# Altium PCB PCB1.PcbDoc
Units mil, origin at the board's own origin, x right, y up, seen from the top; angles counter-clockwise.
Board outline 5655 x 1845 mil, 2 copper layers (Top Layer, Bottom Layer); 13 components, 7 nets, 31 pads, 0 vias.
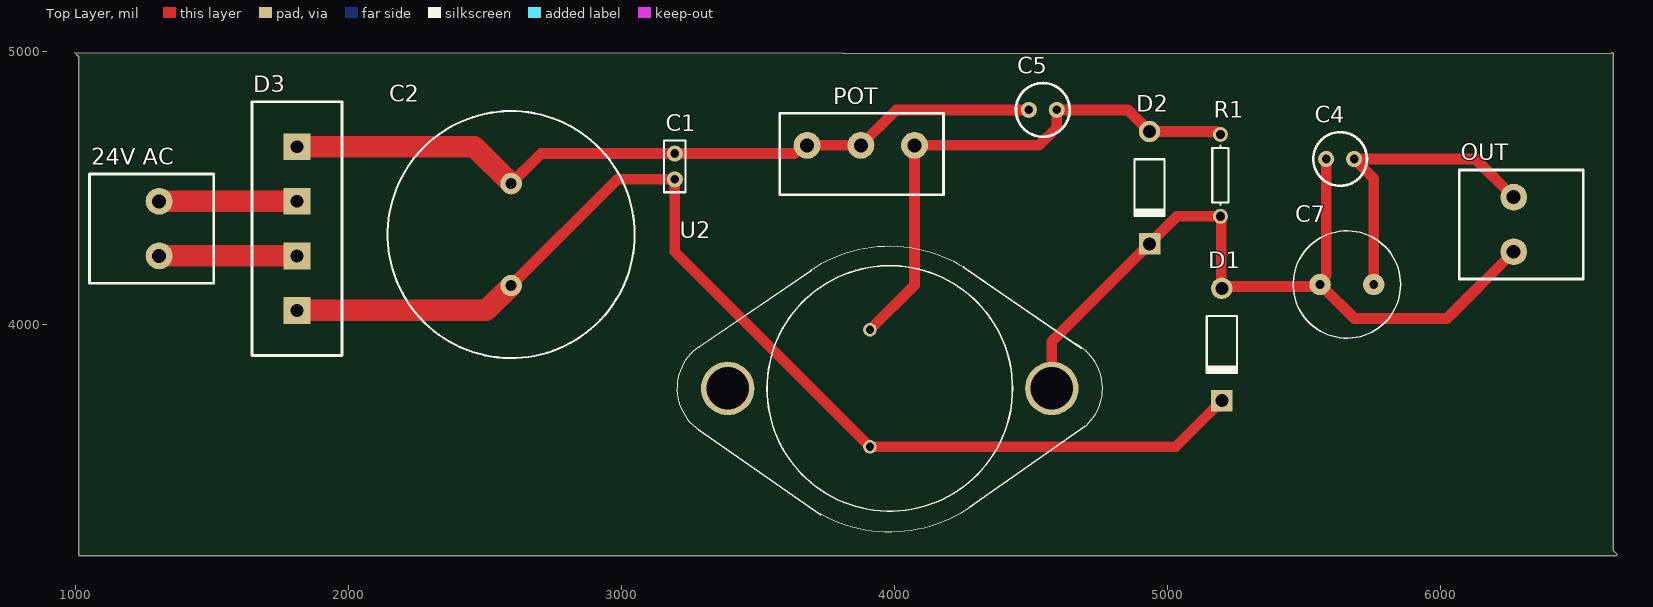
[diagram p0: Top Layer view]
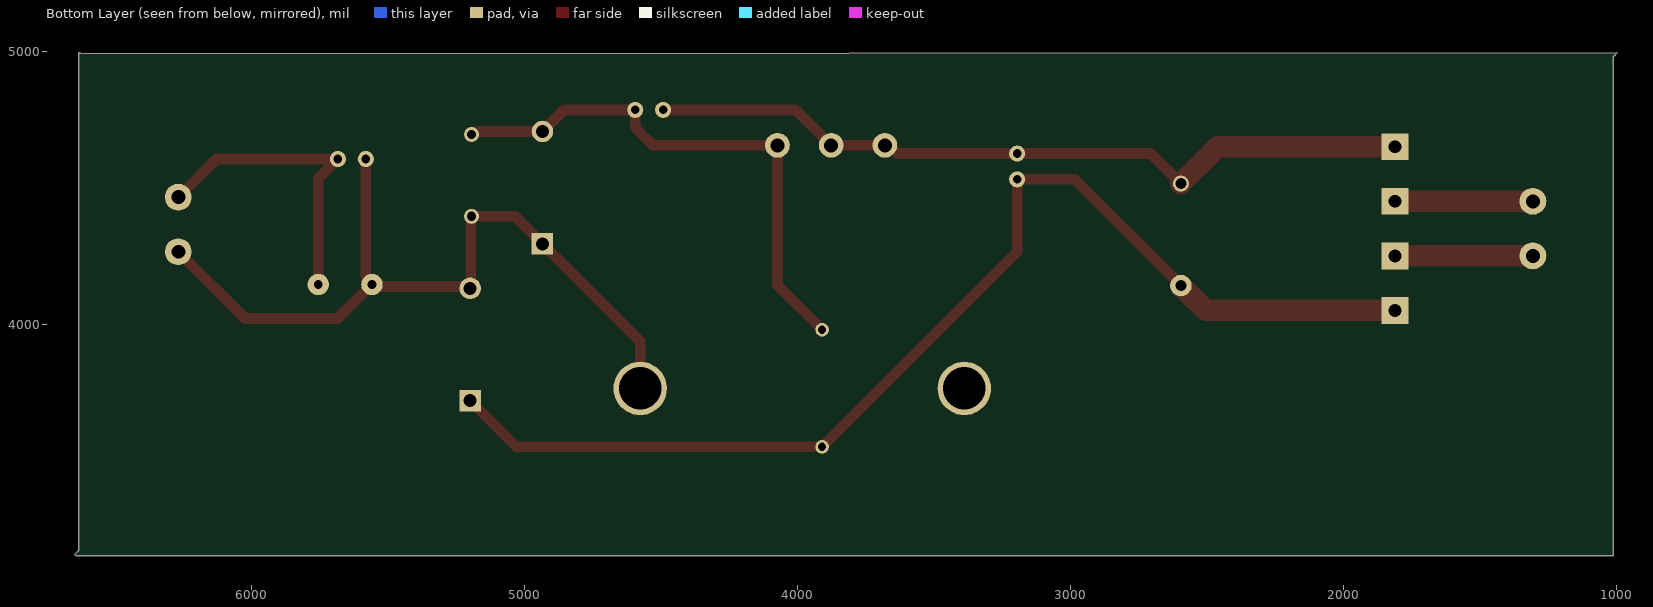
[diagram p1: Bottom Layer view, seen from below]
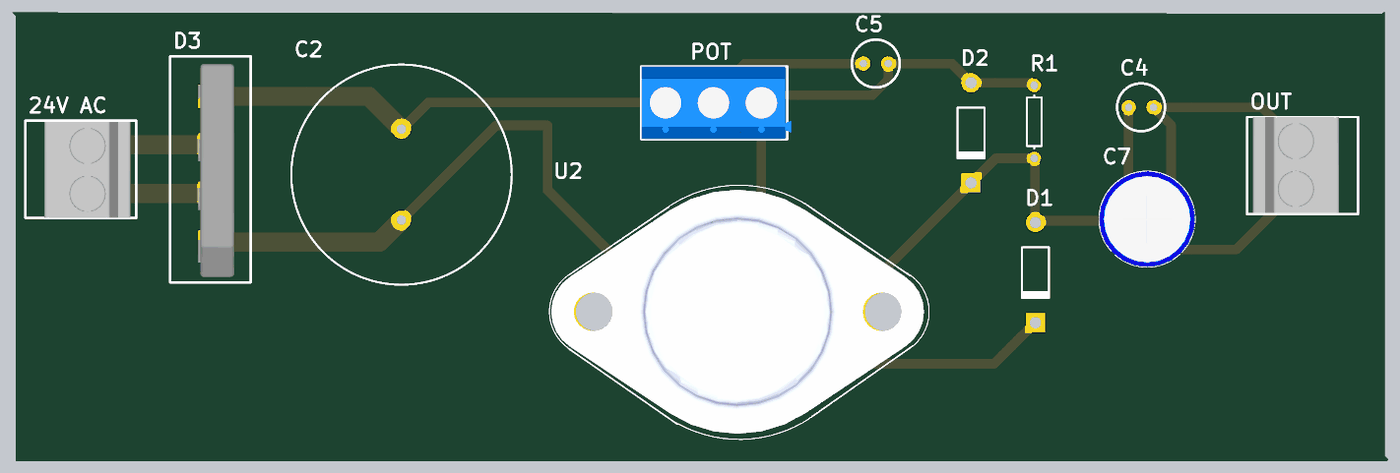
[diagram p2: 3D render of the assembled board from above, using the file's embedded part models]

## Layer stack, top to bottom
Top Solder: solder mask 0.4, Solder Resist, Dk 3.5
Top Layer: signal copper 1.4
Dielectric 1: dielectric 12.6, FR-4, Dk 4.8
Bottom Layer: signal copper 1.4
Bottom Solder: solder mask 0.4, Solder Resist, Dk 3.5

## Board outline
995,4995 1010,4980 1010,3150 6645,3150 6650,3155 6635,3170 6635,4995 6630,4995 6625,4990

## Design rules (kind name [scope] priority, off if disabled: settings)
Clearance [All] p1: gap=10 ignorepadtopadclearanceinfootprint=FALSE except(0: Arc-Hole Track-Hole SMDPad-Hole THPad-Hole Via-Hole Fill-Hole Poly-Hole Region-Hole Text-Hole)
PolygonConnect [All] p1: connectstyle=Relief reliefconductorwidth=10 reliefentries=4 polygonreliefangle="90 Angle" airgapwidth=10
RoutingVias [All] p1: holewidth=28 width=50 viastyle="Through Hole" minholewidth=28 minwidth=50 maxholewidth=28 maxwidth=50
SolderMaskExpansion [All] p1: expansion=4
Width [All] p1: maxlimit=196.85 minlimit=39.37 preferedwidth=78.74
30 further rules are at their usual default settings.

## Components (designator, comment, footprint, x,y, rotation, side; value= is the part's Value field where it differs from the comment)
"24V AC" "2x Terminal" "2x Terminal" 1305,4450 r0 top
C1 "100nF" 100nF 3255.2,-370.63 r90 top
C2 "4700uF_50V" 4700uF_50V 2598.27,4145.43 r90 top
C4 "10uF_35V" 10uF_35V 5487.52,4580.43 r0 top
C5 "10uF_35V" 10uF_35V 4690.12,4809.57 r180 top
C7 "100uF_35V" 100uF_35V 5559.45,4143.23 r0 top
D1 "Diode 1N4007" DO-41 5200,3925 r270 top
D2 "Diode 1N4007" DO-41 4935,4500 r270 top
D3 "bridge_diode" bridge_diode 1808.94,4648.98 r270 top
OUT "2x Terminal" "2x Terminal" 6270,4265 r180 top
POT "3x Terminal" "3x Terminal" 3680,4655 r90 top
R1 "Res1" AXIAL-0.3 5195,4545 r270 top value=120R
U2 "Regulator" LM338K 3386,3764 r0 top

## Footprints (in the part's own frame and the unit in brackets; to place one, negate y for a bottom-side part, rotate by r counter-clockwise, add the part's x,y. Pads: shape width x height; smd on the part's side, far side on the other; paste and mask are expansions set on the pad)
"2x Terminal" [mm]
  round 2.5 / inner round 1.524 / far side round 2.5 hole 1.3: 1(0,0)
  round 2.5 hole 1.3: 2(0,-5.08)
  silkscreen extent -6.48,-7.62 5.08,2.54, body extent -4.5,-7.6 4.5,2.4, height 13.55
"3x Terminal" [mm]
  round 2.5 / inner round 1.524 / far side round 2.3 hole 1.3: 1(0,0) 2(0,-5) 3(0,-10)
  silkscreen extent -4.6,-12.7 3,2.54, body extent -4.6,-13.1 3,2.5, height 10
10uF_35V [mm]
  round 1.5 hole 0.8: +(2.416,0.624) -(5.016,0.624)
  silkscreen extent 1.22,-1.88 6.22,3.12
100nF [mm]
  round 1.5 hole 0.8: 1(124.489,1.529) 2(126.889,1.529)
  silkscreen extent 123.29,0.53 128.09,2.53, body extent 123.23,0.53 128.15,2.53, height 5.46
100uF_35V [mm]
  round 2 hole 0.8: +(0.014,0.045) -(5.014,0.045)
  Top Layer region: 5.535,0.234 5.248,0.547 4.825,0.566 4.512,0.279 4.493,-0.144 4.78,-0.457 5.203,-0.476 5.516,-0.189
  Bottom Layer region: 5.535,0.234 5.248,0.547 4.825,0.566 4.512,0.279 4.493,-0.144 4.78,-0.457 5.203,-0.476 5.516,-0.189
  Multi-Layer region: 5.535,0.234 5.248,0.547 4.825,0.566 4.512,0.279 4.493,-0.144 4.78,-0.457 5.203,-0.476 5.516,-0.189
  silkscreen extent -2.48,-4.95 7.51,5.04, body extent -2.5,-4.99 7.55,5.06, height 16.53
4700uF_50V [mm]
  round 2 hole 1: 1(-0.113,0.083)
  round 2 / inner round 1.524 / far side round 1.5 hole 1: 2(9.387,0.083)
  silkscreen extent -6.86,-11.42 16.14,11.58
AXIAL-0.3 [mm] "Axial Device, Thru-Hole; 2 Leads; 0.3 in Pin Spacing"
  round 1.4 hole 0.85: 1(-3.81,0) 2(3.81,0)
  silkscreen extent -2.77,-0.76 2.77,0.76
bridge_diode [mm]
  rect 2.5x2.5 hole 1.2: AC+(10.134,0.027) AC-(5.054,0.027) DC+(15.214,0.027) DC-(-0.026,0.027)
  silkscreen extent -4.22,-4.16 19.4,4.22, body extent -3.43,-1.24 18.87,2.52, height 18.8
DO-41 [mm] "Diode, Axial; Body 5.2 x 2.7 mm (LxDia. max), Lead Dia. 0.86 mm (max)"
  round 2 hole 1.2: 1(-5.23,0)
  rect 2x2 hole 1.2: 2(5.23,0)
  silkscreen extent -2.65,-1.4 2.75,1.4
LM338K [mil]
  round 50 hole 30: 1(524,-214) 2(524,215)
  round 196 hole 156: 3(1191,0) 4(3,0)
  silkscreen extent -183,-525 1377,520, body extent -176,-502 1356,502, height 351

## Part data
"24V AC" OUT: Manufacturer=WEIDMULLER, Manufacturer Code="PM5.08/2/90 BLK", Farnell Code=1131855, Unit Price="0,55 €"
D1 D2: "1 Amp General Purpose Rectifier", Code_JEDEC=DO-204-AL, ComponentLink1Description="Manufacturer Link", ComponentLink1URL=http://www.fairchildsemi.com/, ComponentLink2Description=Datasheet, ComponentLink2URL=http://www.fairchildsemi.com/ds/1N%2F1N4001.pdf, DatasheetVersion=1998, LatestRevisionDate=17-Jul-2002, LatestRevisionNote="Re-released for DXP Platform.", PackageDescription="Diode, Axial; Body 5.2 x 2.7 mm (LxDia. max), Lead Dia. 0.86 mm (max)", PackageReference=DO-41, PackageVersion=Aug-1999, Published=8-Jun-2000, Publisher="Altium Limited"
POT: Manufacturer=WEIDMULLER, Manufacturer Code="PM5.08/3/90 BLK", Farnell Code=1131856, Unit Price="0,76 €"
R1: "Resistor", LatestRevisionDate=17-Jul-2002, LatestRevisionNote="Re-released for DXP Platform.", PackageDescription="Axial Device, Thru-Hole; 2 Leads; 0.3 in Pin Spacing", PackageReference=AXIAL-0.3, Published=8-Jun-2000, Publisher="Altium Limited"

## Nets (pads, with @x,y where several pads share a name; then routed paths per layer and width w, separated by ;. In a path a pad name is that pad's centre, name@x,y a point inside that pad or via, vN(x,y) a via of type N, cw(c..) or ccw(c..) an arc to the next point about the centre after c; other vN are vias at no path point)
"Net24V AC_1": "24V AC.1" D3.AC- | length 505
  Top Layer w78.74: 1305,4450 D3.AC-
"Net24V AC_2": "24V AC.2" D3.AC+ | length 505
  Top Layer w78.74: 1305,4250 D3.AC+
NetC1_1: C1.1 C2.1 D1.2 D3.DC+ U2.1 | length 4220.8
  Top Layer w39.37: C2.1 2984.53,4530.51 C1.1 3195,4265 U2.1 5030.91,3550 D1.2
  Top Layer w78.74: D3.DC+ 2504.02,4050 C2.1
NetC1_2: C1.2 C2.2 C5.- D3.DC- POT.1 POT.2 | length 2850.4
  Top Layer w39.37: C2.2 2705,4625 C1.2 3634.02,4625 3664.02,4655 POT.1 POT.2 4006.85,4785 C5.-
  Top Layer w78.74: D3.DC- 2460,4650 C2.2
NetC4_+: C4.+ C7.+ D1.1 D2.2 OUT.1 R1.2 U2.3 | length 2948.9
  Top Layer w39.37: U2.3 4577,3936.09 D2.2 5035.91,4395 R1.2 5197.5,4392.5 5197.5,4133.41 D1.1 5207.05,4137.95 C7.+@5552.95,4137.95 ; C4.+ 5582.64,4178.29 5552.95,4148.61 C7.+@5552.95,4137.95 ; OUT.1 6025,4020 5686.08,4020 5568.13,4137.95 C7.+@5552.95,4137.95
NetC4_-: C4.- C7.- OUT.2 | length 1132.8
  Top Layer w39.37: C7.- 5756.85,4533.15 C4.- 6130,4605 OUT.2
NetC5_+: C5.+ D2.1 POT.3 R1.1 U2.2 | length 1994.3
  Top Layer w39.37: U2.2 4073.7,4142.7 POT.3 4530,4655 4595,4720 C5.+ 4855.91,4785 D2.1 5179.83,4705.91 5190.74,4695 R1.1
pads on no net: U2.4